# Altium PCB PCB2.PcbDoc
Units mil, origin at the board's own origin, x right, y up, seen from the top; angles counter-clockwise.
Board outline 3000 x 2250 mil, 2 copper layers (Top Layer, Bottom Layer), stack 61.756 mil thick; 45 components, 36 nets, 128 pads, 148 vias.
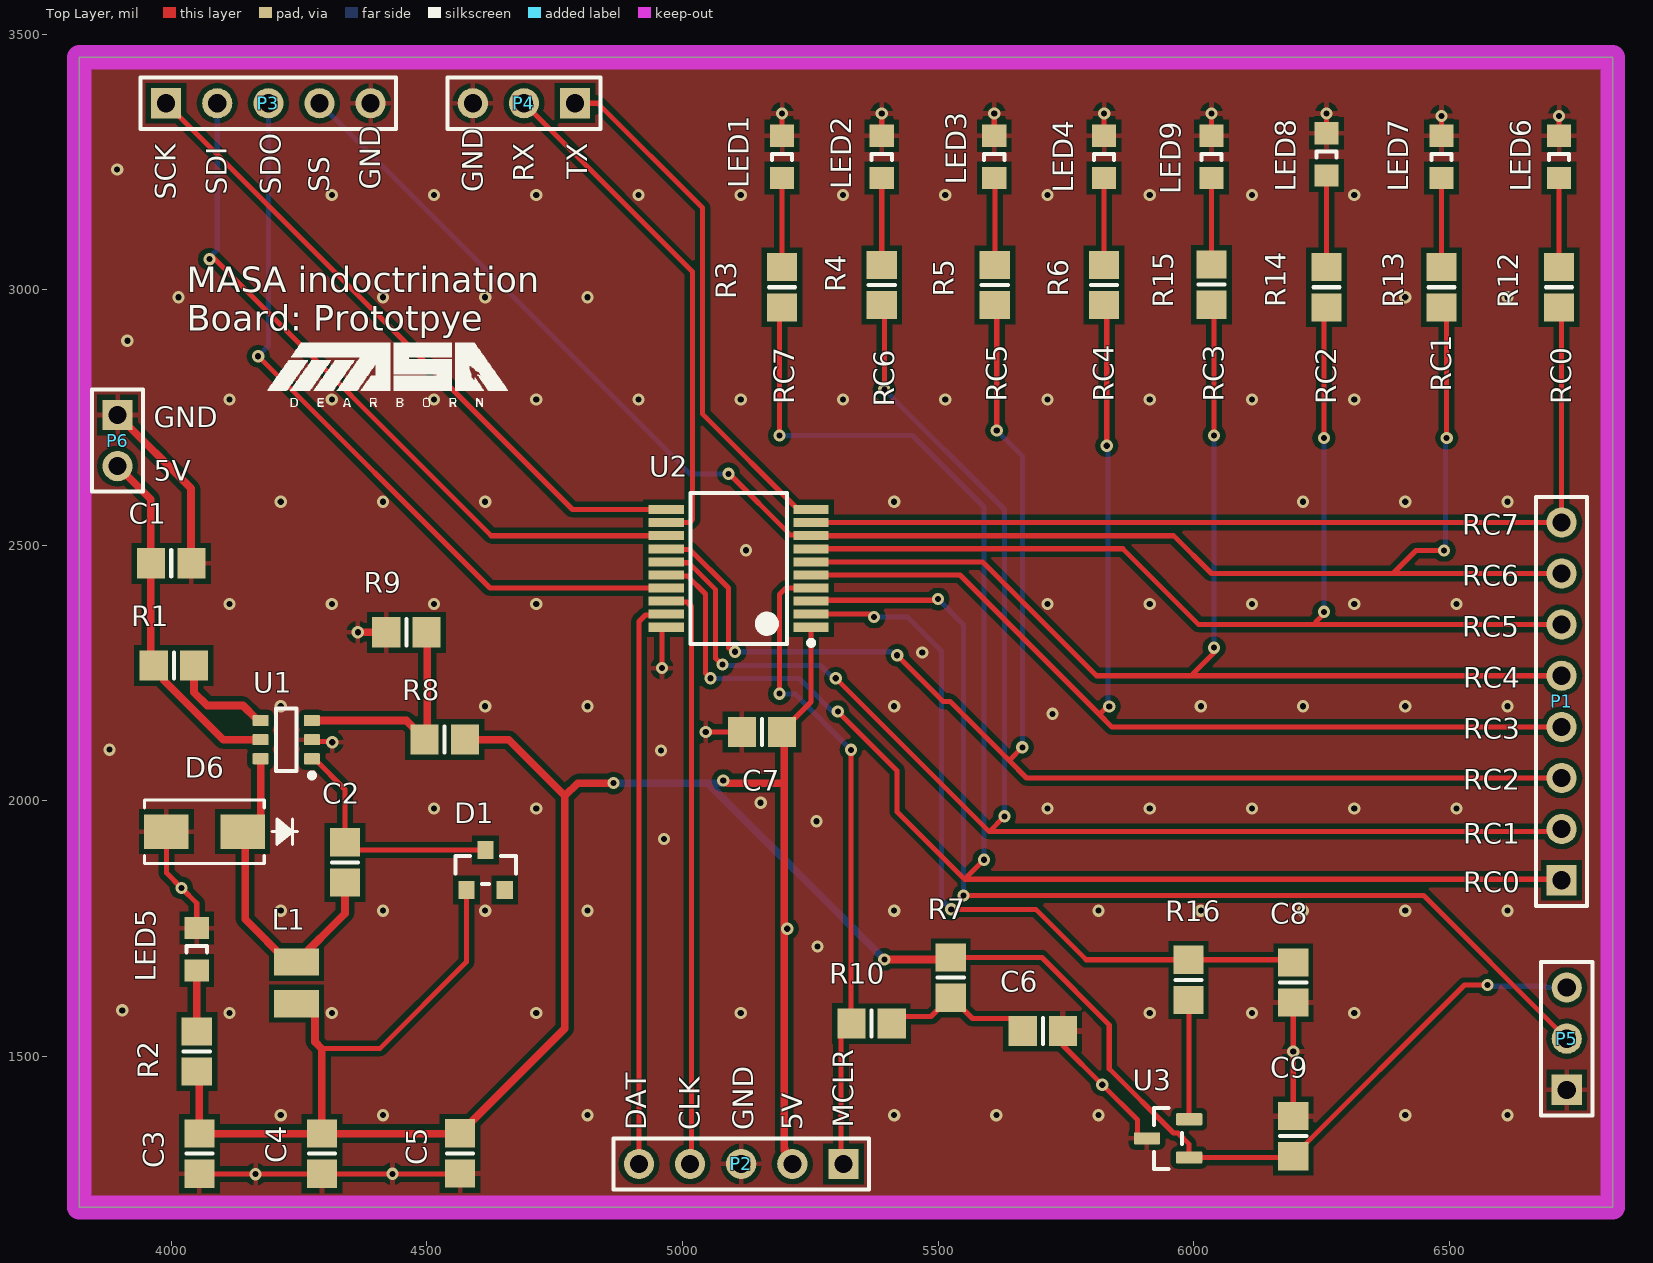
[diagram p0: Top Layer view]
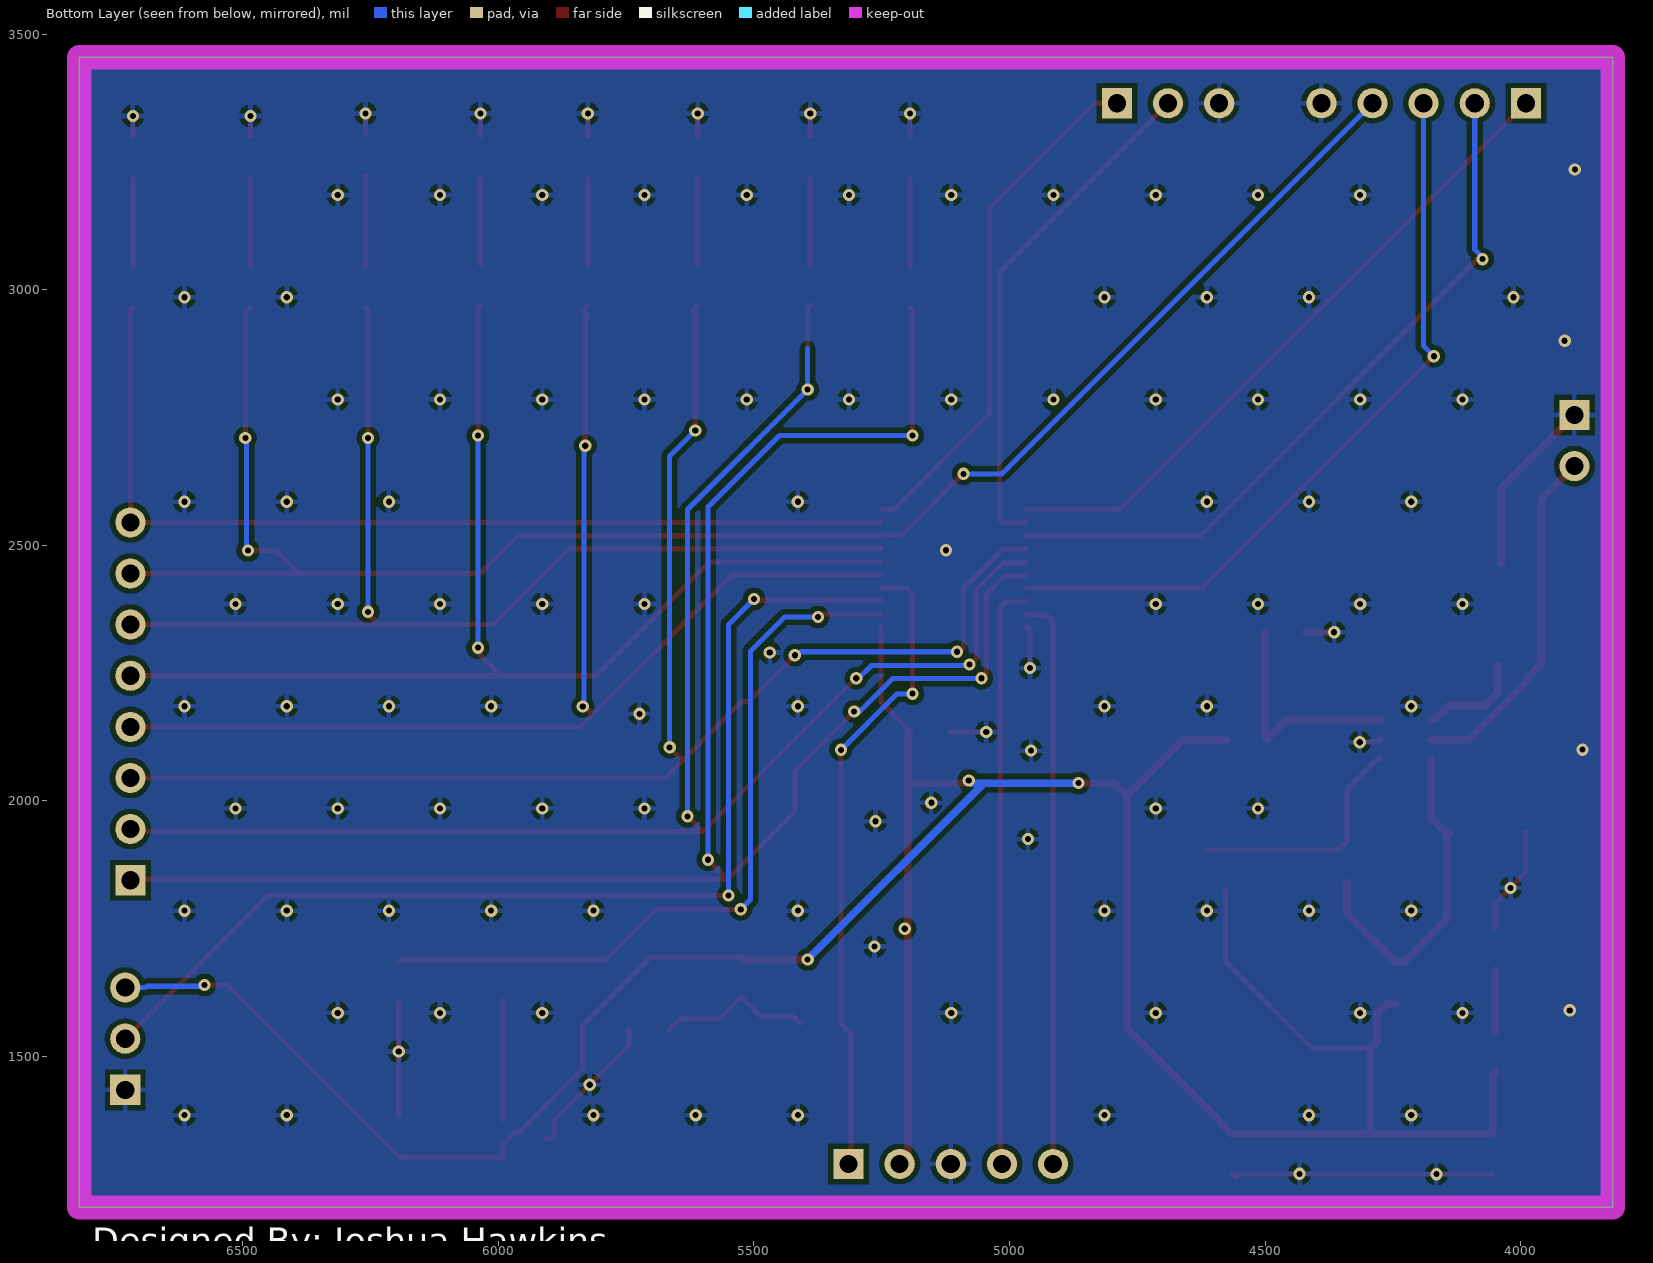
[diagram p1: Bottom Layer view, seen from below]

## Layer stack, top to bottom
Top Solder: solder mask 1, SM-001, Dk 4
Top Layer: signal copper 1.378
Dielectric 1: core 59, Core-043, Dk 4.3
Bottom Layer: signal copper 1.378
Bottom Solder: solder mask 1, SM-001, Dk 4

## Board outline
3820,1205 6820,1205 6820,3455 3820,3455

## Design rules (kind name [scope] priority, off if disabled: settings)
Clearance Clearance_1 [All] p1: gap=10 ignorepadtopadclearanceinfootprint=TRUE except(0: Arc-Hole Track-Hole SMDPad-Hole THPad-Hole Via-Hole Fill-Hole Poly-Hole Region-Hole Text-Hole)
Clearance [All] p2: gap=10 ignorepadtopadclearanceinfootprint=TRUE except(0: Arc-Hole Track-Hole SMDPad-Hole THPad-Hole Via-Hole Fill-Hole Poly-Hole Region-Hole Text-Hole)
PolygonConnect [All] p1: connectstyle=Relief reliefconductorwidth=10 reliefentries=4 polygonreliefangle="90 Angle" airgapwidth=10
RoutingVias [All] p1: holewidth=28 width=50 viastyle="Through Hole" minholewidth=28 minwidth=50 maxholewidth=28 maxwidth=50
SolderMaskExpansion [All] p1: expansion=4 istentingtop=FALSE
Width Width_1 [All] p1: maxlimit=15 minlimit=10 preferedwidth=10 minimp=50.000000 maximp=50.000000 favimp=50.000000
Width [All] p2: maxlimit=15 minlimit=10 preferedwidth=10 minimp=50.000000 maximp=50.000000 favimp=50.000000
30 further rules are at their usual default settings.

## Components (designator, comment, footprint, x,y, rotation, side; value= is the part's Value field where it differs from the comment)
C1 "Cap" 6-0805_M 4000,2465 r180 top value=10uF
C2 "Cap" 6-0805_M 4340,1880 r90 top value=10nF
C3 "Cap" 6-0805_M 4055,1310 r90 top value=10uF
C4 "Cap" 6-0805_M 4295,1310 r90 top value=1uF
C5 "Cap" 6-0805_M 4565,1310.63 r90 top value=100nF
C6 "Cap" 6-0805_M 5705,1550 r0 top value=100nF
C7 "Cap" 6-0805_M 5155.63,2135 r0 top value=100nF
C8 "Cap" 6-0805_M 6195,1645 r270 top value=680pF
C9 "Cap" 6-0805_M 6195,1344.37 r90 top value=100nF
D1 "BAT54-7-F" FP-SOT23-MFG 4615,1865 r90 top value=10pF
D6 "Diode 10TQ035" CDBA5 4065,1940 r180 top
L1 "Inductor" INDC2520X100N 4245,1644.25 r270 top value=4.7uH (schematic designator L?)
LED1 "150080BS75000" 0805_A 5195,3260 r270 top
LED2 "150080BS75000" 0805_A 5390,3260 r270 top
LED3 "150080BS75000" 0805_A 5610,3260 r270 top
LED4 "150080BS75000" 0805_A 5825,3260 r270 top
LED5 "150080BS75000" 0805_A 4050,1710 r270 top
LED6 "150080BS75000" 0805_A 6715,3260 r270 top
LED7 "150080BS75000" 0805_A 6485,3260 r270 top
LED8 "150080BS75000" 0805_A 6260,3265 r270 top
LED9 "150080BS75000" 0805_A 6035,3260 r270 top
P1 "Header 8" HDR1X8 6720,1845 r90 top
P2 "Header 5" HDR1X5 5315,1290 r180 top
P3 "Header 5" HDR1X5 3990,3365 r0 top
P4 "Header 3" HDR1X3 4790,3365 r180 top
P5 "Header 3" HDR1X3 6730,1435 r90 top
P6 "Header 2" HDR1X2 3895,2755 r270 top
R1 "Res1" 6-0805_M 4005,2265 r180 top value=10k
R2 "Res1" 6-0805_M 4050,1510 r270 top value=330
R3 "Res1" 6-0805_M 5195,3005 r270 top value=330
R4 "Res1" 6-0805_M 5390,3009.37 r270 top value=330
R5 "Res1" 6-0805_M 5611.1,3009.37 r270 top value=330
R6 "Res1" 6-0805_M 5825,3009.37 r270 top value=330
R7 "Res1" 6-0805_M 5525,1654.37 r90 top value=10k
R8 "Res1" 6-0805_M 4535,2120 r180 top value=30k
R9 "Res1" 6-0805_M 4460,2330 r0 top value=10k
R10 "Res1" 6-0805_M 5370,1565 r0 top value=330
R12 "Res1" 6-0805_M 6715,3005 r270 top value=330
R13 "Res1" 6-0805_M 6485,3005 r270 top value=330
R14 "Res1" 6-0805_M 6260,3005 r270 top value=330
R15 "Res1" 6-0805_M 6035,3010 r270 top value=330
R16 "Res1" 6-0805_M 5990,1650 r90 top value=0
U1 "LM2736XMK/NOPB" DDC0006A_L 4225,2120 r180 top
U2 "PIC16F18345-I/SS" MCHP-SS-20_V 5110,2455 r180 top
U3 "TMP235AQDBZTQ1" FP-DBZ0003A-MFG 5950,1340 r180 top

## Footprints (in the part's own frame and the unit in brackets; to place one, negate y for a bottom-side part, rotate by r counter-clockwise, add the part's x,y. Pads: shape width x height; smd on the part's side, far side on the other; paste and mask are expansions set on the pad)
6-0805_M [mm] "Chip Resistor, Body 2.0x1.2mm, IPC Low Density"
  rect 1.4x1.5 smd: 1(-1,0) 2(1,0)
  silkscreen extent 0,-0.65 0,0.65, body extent -1.07,-0.7 1.07,0.7, height 0.7
0805_A [mm] "Chip LED, 2-Leads, Body 2.0x1.3mm, IPC Medium Density"
  rect 1.1x1.2 smd: 1(-1.05,0) 2(1.05,0)
  silkscreen extent -0.15,-0.5 0.15,0.5, body extent -1,-0.62 1,0.63, height 0.68
CDBA5 [mil]
  rect 87x67 smd paste+0 mask+0: 1(-74.5,0) 2(74.5,0)
  silkscreen extent -182,-62 117,62, body extent 0,0 10,10, height 10
DDC0006A_L [mm] "SOT23, 6-Leads, Body 3.05x1.75mm, Pitch 0.95mm, IPC High Density"
  rrect18% 0.8x0.55 smd: 1(-1.275,0.95) 2(-1.275,0) 3(-1.275,-0.95) 4(1.275,-0.95) 5(1.275,0) 6(1.275,0.95)
  silkscreen extent -1.4,-1.55 0.5,1.9, body extent -1.43,-1.48 1.43,1.49, height 0.9
FP-DBZ0003A-MFG [mm]
  rrect17% 1.3x0.6 smd paste+0 mask+0: 1(-1.05,0.95) 2(-1.05,-0.95) 3(1.05,0)
  silkscreen extent -0.7,-1.52 0.7,1.52, body extent -1.8,-1.62 1.8,1.62, height 0.25
FP-SOT23-MFG [mm]
  rect 0.9x0.8 smd paste+0 mask+0: 1(-1,0.95) 2(-1,-0.95) 3(1,0)
  silkscreen extent -0.7,-1.5 0.7,1.5, body extent -1.55,-1.6 1.55,1.6, height 0.25
HDR1X2 [mm] "Connector; Header; 2 Position"
  rect 1.5x1.5 hole 0.9: 1(0,0)
  round 1.5 hole 0.9: 2(2.54,0)
  silkscreen extent -1.27,-1.27 3.81,1.27
HDR1X3 [mm] "Connector; Header; 3 Position"
  rect 1.5x1.5 hole 0.9: 1(0,0)
  round 1.5 hole 0.9: 2(2.54,0) 3(5.08,0)
  silkscreen extent -1.27,-1.27 6.35,1.27
HDR1X5 [mm] "Connector; Header; 5 Position"
  rect 1.5x1.5 hole 0.9: 1(0,0)
  round 1.5 hole 0.9: 2(2.54,0) 3(5.08,0) 4(7.62,0) 5(10.16,0)
  silkscreen extent -1.27,-1.27 11.43,1.27
HDR1X8 [mm] "Connector; Header; 8 Position"
  rect 1.5x1.5 hole 0.9: 1(0,0)
  round 1.5 hole 0.9: 2(2.54,0) 3(5.08,0) 4(7.62,0) 5(10.16,0) 6(12.7,0) 7(15.24,0) 8(17.78,0)
  silkscreen extent -1.27,-1.27 19.05,1.27
INDC2520X100N [mm]
  rect 1.35x2.22 smd: 1(-1.035,0) 2(1.035,0)
MCHP-SS-20_V [mm] "SOP, 20-Leads, Body 7.50x5.60mm, Pitch 0.65mm"
  rect 1.75x0.45 smd: 1(-3.6,2.925) 2(-3.6,2.275) 3(-3.6,1.625) 4(-3.6,0.975) 5(-3.6,0.325) 6(-3.6,-0.325) 7(-3.6,-0.975) 8(-3.6,-1.625) 9(-3.6,-2.275) 10(-3.6,-2.925) 11(3.6,-2.925) 12(3.6,-2.275) 13(3.6,-1.625) 14(3.6,-0.975) 15(3.6,-0.325) 16(3.6,0.325) 17(3.6,0.975) 18(3.6,1.625) 19(3.6,2.275) 20(3.6,2.925)
  silkscreen extent -3.73,-3.75 2.4,3.82, body extent -3.9,-3.75 3.9,3.75, height 2

## Part data
C1 C2 C3 C4 C5 C6 C7 C8 C9: "Capacitor", LatestRevisionDate=17-Jul-2002, LatestRevisionNote="Re-released for DXP Platform.", PackageDescription="Radial Cap, Thru-Hole; 2 Leads; 0.3 in Pin Spacing", PackageReference=RAD-0.3, Published=8-Jun-2000, Publisher="Altium Limited"
D1: library part CMP-0303-00002-2, "DIODE SCHOTTKY 30V 200MA SOT23-3", Capacitance=10pF, Forward Current=200mA, Manufacturer="Diodes Inc.", Max Junction Temp=+150°C, Max Repetitive Reverse Voltage=30V, Max Surge Forward Current=600mA, Package=SOT23, Peak Reverse Current=2uA, Temperature="-65°C to +150°C", Temperature Range Low=-65°C, Automotive=No, Automotive Grade=NA, Category=Diode, ComponentLink2Description=Datasheet, ComponentLink2URL=https://www.diodes.com/assets/Datasheets/ds11005.pdf, Device Class L1="Discrete Semiconductors", Device Class L2=Diodes, Device Class L3="Schottky Diodes", Digikey Description="DIODE SCHOTTKY 30V 200MA SOT23-3", Footprint Url=https://www.diodes.com/assets/Package-Files/SOT23.pdf, Height=1.1mm, Lead Free=Yes, Manufacturer Part Number=BAT54-7-F, Mouser Description="Switching diode SOT-23 30 V 200 mA", Octopart=https://octopart.com/bat54-7-f-diodes+inc.-39681803, Reverse Voltage=30V, RoHS=TRUE, Standoff Height=0.013mm, Temperature Range High=+150°C
D6: "Schottky Rectifier", ComponentLink1Description="Manufacturer Link", ComponentLink1URL=http://www.irf.com/, ComponentLink2Description=Datasheet, ComponentLink2URL=http://www.irf.com/product-info/datasheets/data/10tq.pdf, DatasheetVersion=PD-2.057B, LatestRevisionDate=17-Jul-2002, LatestRevisionNote="Re-released for DXP Platform.", Note="Terminal 2 is the TAB and is electrically connected to the cathode", PackageDescription="TO, Thru-Hole, Vertical, Heatsink Mounted; 3 In-Line Leads (1 Absent); Pitch 2.54 mm", PackageReference=TO-220AC, PackageVersion=Feb-1998, Published=8-Jun-2000, Publisher="Altium Limited"
LED1 LED2 LED3 LED4 LED5 LED6 LED7 LED8 LED9: library part CMP-1426-00008-1, "SMD mono-color Chip LED, WL-SMCW, Blue", Color=Blue, Manufacturer="Wuerth Elektronik", ComponentLink1Description="Manufacturer URL", ComponentLink1URL=http://www.we-online.com, ComponentLink2Description=Datasheet, ComponentLink2URL=http://katalog.we-online.com/led/datasheet/150080BS75000.pdf, PackageReference=0805_A, PartNumber=150080BS75000
P1: "Header, 8-Pin", LatestRevisionDate=17-Jul-2002, LatestRevisionNote="Re-released for DXP Platform.", Publisher="Altium Limited"
P2 P3: "Header, 5-Pin", LatestRevisionDate=17-Jul-2002, LatestRevisionNote="Re-released for DXP Platform.", Publisher="Altium Limited"
P4 P5: "Header, 3-Pin", LatestRevisionDate=17-Jul-2002, LatestRevisionNote="Re-released for DXP Platform.", Publisher="Altium Limited"
P6: "Header, 2-Pin", LatestRevisionDate=17-Jul-2002, LatestRevisionNote="Re-released for DXP Platform.", Publisher="Altium Limited"
R1 R2 R3 R4 R5 R6 R7 R8 R9 R10 R12 R13 R14 R15 R16: "Resistor", LatestRevisionDate=17-Jul-2002, LatestRevisionNote="Re-released for DXP Platform.", PackageDescription="Axial Device, Thru-Hole; 2 Leads; 0.3 in Pin Spacing", PackageReference=AXIAL-0.3, Published=8-Jun-2000, Publisher="Altium Limited"
U1: library part CMP-0069-01211-3, "750mA Load Step-Down DC-DC Regulator, 6-pin Tiny SOT23, Pb-Free", Manufacturer="Texas Instruments", PackageTopMarking=SHAB*XTT, PowerWise=N, Code_IPC=SOT26A-6, Code_JEDEC=MO-193-AA, ComponentLink1Description="Datasheet URL", ComponentLink1URL=http://www.ti.com/general/docs/lit/getliterature.tsp?genericPartNumber=LM2736&fileType=pdf, CompType=Switcher, PackageDescription="Molded TSOT, 2.97 x 1.65 x 0.87mm Body, 6 Lead, 0.95mm Pitch", PackageReference=DDC0006A, PinCount=6, RoHS=Y
U2: library part CMP-2000-06894-1, "Full-Featured, Low Pin Count Microcontrollers with XLP, 8 Bit, 14 KB, 1024 RAM, 1.8 to 5.5 V, -40 to 85 degC, 20-Pin SSOP (SS), RoHS, Tube", Manufacturer=Microchip-Technology, Operating Temperature=-40°C~85°C(TA), Package / Case="20-SSOP(0.209\",5.30mmWidth)", Package Description="20-Pin Shrink Small Outline Package Integrated Circuit, Body 7.2 x 5.3 mm, Pitch 0.65 mm", Package Reference=SS-20, Supplier Device Package=20-SSOP, Voltage - Supply (Vcc/Vdd)=2.3V~5.5V, Category=IntegratedCircuits(ICs), Connectivity=I²C,LIN,SPI,UART/USART, Core Processor=PIC, Core Size=8-Bit, Data Converters=A/D17x10b,D/A1x5b, Datasheet URL=http://ww1.microchip.com/downloads/en/DeviceDoc/40001795C.pdf, Datasheet Version="Rev. C, 10/2016", EEPROM Size=256x8, Family=Embedded-Microcontrollers, Manufacturer URL=http://www.microchip.com/, Mounting Technology=SurfaceMount, Number of I/O=18, Oscillator Type=Internal, Package URL=http://ww1.microchip.com/downloads/en/PackagingSpec/00000049CE.pdf, Packaging=Tube, Peripherals=Brown-outDetect/Reset,POR,PWM,WDT, Program Memory Size=14KB(8Kx14), Program Memory Type=FLASH, RAM Size=1Kx8, Series=PIC®XLP™16F, Speed=32MHz
U3: library part CMP-04948-000003-1, "LOW-POWER HIGH-ACCURACY ANALOG O", Ambient Temperature Range High=+150°C, Ambient Temperature Range Low=-40°C, Manufacturer="Texas Instruments", Manufacturer Part Number=TMP235A2DBZR, Max Supply Voltage=5.5V, Min Supply Voltage=2.3V, Operating Supply Current=9uA, Output Current=500uA, Package=DBZ0003A, Temperature="-40°C to +150°C", Accuracy=0.5%, Automotive=No, Category=IC, ComponentLink2Description=Datasheet, ComponentLink2URL=http://www.ti.com/lit/ds/symlink/tmp235.pdf, Device Class L1=Sensors, Device Class L2="Temperature and Humidity Sensors", Device Class L3=unset, Digikey Description="LOW-POWER HIGH-ACCURACY ANALOG O", Height=1.12mm, Lead Free=Yes, Max Junction Temp=+150°C, Mouser Description="±2°C Analog output temperature sensor, with 10mV /°C gain 3-SOT-23 -40 to 150", Octopart=https://octopart.com/tmp235a2dbzr-texas+instruments-94966376, RoHS=TRUE, Sensor Output="Analog Voltage", Standoff Height=0.01mm, Temperature Range High=+150°C, Temperature Range Low=-40°C
L1: Code_IEC=1005, Code_JEITA=0402, LatestRevisionDate=29-May-2009, LatestRevisionNote="IPC-7351 Footprint Added.", PackageDescription="Chip Inductor", PackageReference=0402-A, Published=8-Jun-2000, Publisher="Altium Limited"

## Via types
v1: diameter 24, hole 12, Top Layer to Bottom Layer, 148 vias

## Nets (pads, with @x,y where several pads share a name; then routed paths per layer and width w, separated by ;. In a path a pad name is that pad's centre, name@x,y a point inside that pad or via, vN(x,y) a via of type N, cw(c..) or ccw(c..) an arc to the next point about the centre after c; other vN are vias at no path point)
5V0: C3.2 C4.2 C5.2 C7.2 C9.1 D1.1 L1.2 P2.2 P5.3 R2.2 R7.2 R8.1 U2.1 U3.1 | length 6112.5
  Top Layer w10: C4.2@4294.33,1350.04 C4.2 ; 4294.33,1515.52 4407.8,1515.52 4577.6,1685.31 D1.1 ; C7.2 5195,2136.97 5251.73,2193.7 U2.1 ; P2.2 P2.2@5215,1303.27 ; R7.2 5703.3,1693.74 5835,1562.04 5835,1476.3 5960.71,1350.59 5969.41,1350.59 5991.34,1328.66 U3.1 6192.6,1302.6 C9.1 6530,1640 v1(6575,1640)
  Top Layer w15: R2.2 4055,1465.63 C3.2 C4.2 4566.34,1349.37 4587.03,1370.06 4587.03,1372.03 4770,1555 4770,2010 ; L1.2 4262.13,1603.5 4281.2,1584.43 4281.2,1528.65 4294.33,1515.52 C4.2@4294.33,1350.04 ; R8.1 4574.61,2119.76 4660.24,2119.76 4770,2010 ; v1(4865,2035) 4795,2035 4770,2010 ; v1(5080,2040) 5082.44,2040 5087.44,2035 5199.24,2035 ; C7.2 5199.24,2130.76 5199.24,2035 ; P2.2@5215,1303.27 5213.65,1303.27 5199.85,1317.07 5199.85,1320.2 5199.24,1320.81 5199.24,2035 ; v1(5395,1690) 5521.26,1690 R7.2
  Bottom Layer w10: v1(6575,1640) 6577.5,1637.5 6687.5,1637.5 6690,1635 P5.3
  Bottom Layer w15: v1(4865,2035) 5050,2035 ; v1@5075,2035 5050,2035 ; v1(5395,1690) 5050,2035
  other v1: 5205,1750
7V4: C1.2 P6.2 R1.2 U1.5 | length 694.9
  Top Layer w15: P6.2 3960,2590 3960,2465.63 C1.2 3960,2464.37 3960,2270.63 R1.2 ; R1.2@3963.66,2265 3985.69,2242.97 3985.69,2236.3 4101.99,2120 U1.5
CLK/PDC: P2.4 U2.18 | length 1145.4
  Top Layer w10: U2.18 4970,2389.29 5008.93,2389.29 5017.72,2380.5 5017.72,1292.72 P2.4
DAT/PGD: P2.5 U2.19 | length 1120.3
  Top Layer w10: P2.5 4915,2351.1 4927.61,2363.7 4966.54,2363.7 U2.19
GND: C1.1 C3.1 C4.1 C5.1 C6.2 C7.1 C8.2 C9.2 D6.2 LED1.1 LED2.1 LED3.1 LED4.1 LED5.1 LED6.1 LED7.1 LED8.1 LED9.1 P2.3 P3.5 P4.3 P5.1 P6.1 R9.1 U1.2 U2.20 U3.3 | length 2172.9
  Top Layer w10: D6.2 3990.5,1859.5 v1(4020,1830) 4050,1800 LED5.1 ; C1.1@4038.74,2465.63 C1.1 ; C3.1 4055.63,1270 v1(4165,1270) 4294.37,1270 C4.1 v1(4432.84,1270.63) 4553.11,1270.63 4558.74,1265 C5.1 ; U1.2@4278.47,2116.72 v1@4313.28,2116.72 ; v1(4960,2260) 4960,2335.98 4963.86,2339.84 U2.20 ; v1@5050.63,2135 C7.1 ; P2.3@5112.5,1292.5 P2.3 ; LED1.1 v1(5195,3345) ; LED2.1 v1(5390,3345) ; LED3.1 5610,3335 5610.86,3335.86 5610.86,3344.14 v1(5610,3345) ; C6.2@5744.37,1548.03 5744.37,1521.93 v1(5821.38,1444.92) 5890.08,1376.22 5890.08,1346.81 5896.89,1340 U3.3 ; LED4.1 v1(5825,3345) ; LED9.1 v1(6035,3345) ; C9.2 C8.2 ; LED8.1 v1(6260,3345) ; LED7.1 v1(6485,3340) ; LED6.1 v1(6715,3340)
  Top Layer w15: P6.1 4038.74,2611.26 C1.1@4038.74,2465.63 ; U1.2 U1.2@4278.47,2116.72 ; v1@4313.28,2116.72 v1(4315,2115) ; v1(4365,2330) R9.1 ; C6.2@5744.37,1548.03 C6.2
  other v1: 4214.15,1385.43 4414.15,1385.43 4814.15,1385.43 5414.15,1385.43 5614.15,1385.43 5814.15,1385.43 6414.15,1385.43 6614.15,1385.43 6195,1510 4114.15,1585.43 4314.15,1585.43 4714.15,1585.43 5114.15,1585.43 5914.15,1585.43 6114.15,1585.43 6314.15,1585.43 3904.15,1590.43 5264.15,1715.43 4214.15,1785.43 4414.15,1785.43 4614.15,1785.43 4814.15,1785.43 5414.15,1785.43 5814.15,1785.43 6014.15,1785.43 6214.15,1785.43 6414.15,1785.43 6614.15,1785.43 4964.15,1925.43 5262.33,1960.43 4514.15,1985.43 4714.15,1985.43 5714.15,1985.43 5914.15,1985.43 6114.15,1985.43 6314.15,1985.43 6514.15,1985.43 5153.01,1996.57 4957.97,2098.67 3879.15,2100.43 5045.63,2135 5724.15,2170.43 4214.15,2185.43 4614.15,2185.43 4814.15,2185.43 5414.15,2185.43 6014.15,2185.43 6214.15,2185.43 6414.15,2185.43 6614.15,2185.43 5469.15,2290.43 4114.15,2385.43 4314.15,2385.43 4514.15,2385.43 4714.15,2385.43 5714.15,2385.43 5914.15,2385.43 6114.15,2385.43 6314.15,2385.43 6514.15,2385.43 5124.15,2490.43 4214.15,2585.43 4414.15,2585.43 4614.15,2585.43 5414.15,2585.43 6214.15,2585.43 6414.15,2585.43 6614.15,2585.43 4114.15,2785.43 4314.15,2785.43 4514.15,2785.43 4714.15,2785.43 4914.15,2785.43 5114.15,2785.43 5314.15,2785.43 5514.15,2785.43 5714.15,2785.43 5914.15,2785.43 6114.15,2785.43 6314.15,2785.43 3914.15,2900.43 4014.15,2985.43 4414.15,2985.43 4614.15,2985.43 4814.15,2985.43 6414.15,2985.43 6614.15,2985.43 4314.15,3185.43 4514.15,3185.43 4714.15,3185.43 4914.15,3185.43 5114.15,3185.43 5314.15,3185.43 5514.15,3185.43 5714.15,3185.43 5914.15,3185.43 6114.15,3185.43 6314.15,3185.43 3894.15,3235.43
MCLR: P2.1 R10.1 U2.4 | length 1240.5
  Top Layer w10: v1(5190,2210) 5190,2404.33 5202.28,2416.61 U2.4 ; P2.1@5310,1315 5310,1544.37 R10.1 5330,1565.63 v1(5330,2100)
  Bottom Layer w10: v1(5190,2210) 5190.79,2209.21 5220.79,2209.21 v1(5330,2100)
NetC2_1: C2.1 D6.1 L1.1 U1.6 | length 659.3
  Top Layer w15: D6.1 4148.8,1940 4174.8,1966 U1.6 ; D6.1@4144.5,1935 4144.5,1768.37 4227.87,1685 L1.1 4340,1780 C2.1
NetC2_2: C2.2 D1.3 U1.1 | length 475
  Top Layer w10: U1.1 4280.12,2082.6 4340,2022.72 C2.2@4340,1921.34 ; C2.2 C2.2@4340,1921.34 ; D1.3 4356.97,1904.37 C2.2@4340,1921.34
NetC6_1: C6.1 R7.1 R10.2 | length 303.1
  Top Layer w10: R10.2 5422.67,1578.3 5486.33,1578.3 5523.03,1615 R7.1 ; R7.1@5526.97,1615 5567.44,1574.53 5643.07,1574.53 5665.63,1551.97 C6.1
NetLED1_2: LED1.2 R3.1 | length 174.3
  Top Layer w10: R3.1 LED1.2
NetLED2_2: LED2.2 R4.1 | length 169.9
  Top Layer w10: R4.1 LED2.2
NetLED3_2: LED3.2 R5.1 | length 170.4
  Top Layer w10: LED3.2 5611.1,3217.56 R5.1
NetLED4_2: LED4.2 R6.1 | length 169.9
  Top Layer w10: R6.1 LED4.2
NetLED5_2: LED5.2 R2.1 | length 119.3
  Top Layer w15: R2.1 LED5.2
NetLED6_2: LED6.2 R12.1 | length 174.3
  Top Layer w10: R12.1 LED6.2
NetLED7_2: LED7.2 R13.1 | length 174.3
  Top Layer w10: R13.1 LED7.2
NetLED8_2: LED8.2 R14.1 | length 179.3
  Top Layer w10: R14.1 LED8.2
NetLED9_2: LED9.2 R15.1 | length 169.3
  Top Layer w10: R15.1 LED9.2
NetP5_2: P5.2 U2.3 | length 2121.9
  Top Layer w10: U2.3 5253.46,2392.76 5497.76,2392.76 v1(5500,2395) ; v1(5550,1815) 6450,1815 P5.2@6712.5,1552.5
  Bottom Layer w10: v1(5500,2395) 5550,2345 v1(5550,1815)
NetR1_1: R1.1 U1.4 | length 205.5
  Top Layer w15: R1.1 4044.37,2212.97 4070.49,2186.85 4140.43,2186.85 4166.56,2160.73 4171.48,2160.73 U1.4
NetR8_2: R8.2 R9.2 U1.3 | length 449.7
  Top Layer w15: U1.3 4460.2,2157.4 4495.63,2121.97 R8.2 4500.63,2125 4500.63,2328.74 R9.2
NetR16_1: R16.1 U3.2 | length 233.8
  Top Layer w10: R16.1 5991.34,1609.29 U3.2
RC0: P1.1 R3.2 U2.16 | length 3577.1
  Top Layer w10: U2.16 4970,2440.47 5009.53,2440.47 5045,2405 5045,2250 ; v1(5190,2715) 5190,2960.63 R3.2 ; v1(5304.09,2175) 5420,2059.09 5420,1979 5552,1847 ; v1(5590,1885) 5552,1847 ; P1.1 6718,1847 5552,1847
  Bottom Layer w10: v1(5055,2240) 5228.18,2240 5293.18,2175 v1(5304.09,2175) ; v1(5190,2715) 5450,2715 5590,2575 v1(5590,1885)
RC1: P1.2 R4.2 U2.15 | length 3273.2
  Top Layer w10: U2.15 4970,2466.06 5012.22,2466.06 5065,2413.28 5065,2278.54 5076.54,2267 v1(5078.54,2267) ; v1(5300,2240) 5600,1940 ; R4.2 5395,2965 v1(5395,2805) ; v1(5630,1970) 5600,1940 ; P1.2 6715,1940 5600,1940
  Bottom Layer w10: v1(5078.54,2267) 5080.54,2265 5270,2265 5295,2240 v1(5300,2240) ; 5395,2885 v1(5395,2805) 5630,2570 v1(5630,1970)
RC2: P1.3 R5.2 U2.14 | length 2933.9
  Top Layer w10: U2.14 4970,2491.65 5014.91,2491.65 5090,2416.57 5090,2299.39 5091.82,2299.39 5099.21,2292 v1(5103,2292) ; v1(5420,2285) 5510,2195 5523.28,2195 5639.14,2079.14 ; R5.2 5620,2961.1 5615,2956.1 v1(5615,2725) ; v1(5665,2105) 5639.14,2079.14 ; P1.3 5673.28,2045 5639.14,2079.14
  Bottom Layer w10: v1(5103,2292) 5409.21,2292 5416.21,2285 v1(5420,2285) ; v1(5615,2725) 5665,2675 5665,2105.91 v1@5664.55,2105.45
RC3: P1.4 R6.2 U2.5 | length 2415
  Top Layer w10: U2.5 5542.8,2442.2 5815,2170 ; R6.2 5835,2960 5825,2950 5830,2945 v1(5830,2695) ; v1(5835,2185) 5831.21,2185 5816.21,2170 5815,2170 ; P1.4 5840,2145 5815,2170
  Bottom Layer w10: v1(5830,2695) 5832.5,2692.5 5832.5,2187.5 v1(5835,2185)
RC4: P1.5 R15.2 U2.6 | length 2304.8
  Top Layer w10: U2.6 5587.2,2467.8 5810,2245 6000,2245 ; R15.2 6040,2965.63 v1(6040,2715) ; v1(6040,2300) 6040,2290 6000,2250 6000,2245 ; P1.5 6000,2245
  Bottom Layer w10: v1(6040,2300) v1(6040,2715)
RC5: P1.6 R14.2 U2.7 | length 2158.6
  Top Layer w10: U2.7 5861.61,2493.39 6010,2345 6240,2345 ; v1(6255,2370) 6255,2366.21 6240,2351.21 6240,2345 ; v1(6255,2710) 6255,2960.63 R14.2 ; P1.6 6240,2345
  Bottom Layer w10: v1(6255,2370) v1(6255,2710)
RC6/SS: P1.7 P3.4 R13.2 U2.8 | length 3414.3
  Top Layer w10: v1@5090,2641.78 5211.07,2520.71 5252.05,2520.71 5252.76,2520 U2.8 5961.02,2518.98 6035,2445 6390,2445 ; R13.2 6495,2955.63 v1(6495,2710) ; v1(6490,2490) 6435,2490 6390,2445 ; P1.7 6390,2445
  Bottom Layer w10: P3.4 5015,2640 v1(5090,2640) ; v1(6490,2490) 6492.5,2492.5 6492.5,2707.5 v1(6495,2710)
RC7: P1.8 R12.2 U2.9 | length 1891.1
  Top Layer w10: U2.9 6719.57,2544.57 P1.8 6720,2960.63 R12.2
RX: P4.2 U2.12 | length 1004.8
  Top Layer w10: P4.2 5019.57,3035.43 5019.57,2550.42 5013.71,2544.57 U2.12
SCK: P3.1 U2.11 | length 1307.5
  Top Layer w10: P3.1 4784.84,2570.16 U2.11
SDI: P3.2 U2.13 | length 1425.7
  Top Layer w10: v1@4080,3065 4626.02,2518.98 U2.13
  Bottom Layer w10: v1(4075,3060) 4075,3063.79 4090,3078.79 P3.2
SDO: P3.3 U2.17 | length 1489.4
  Top Layer w10: v1(4170,2870) 4623.39,2416.61 U2.17
  Bottom Layer w10: v1(4170,2870) 4190,2890 P3.3
Temp: C8.1 R16.2 U2.2 | length 1510.1
  Top Layer w10: U2.2 5365.78,2365.43 5371.21,2360 v1(5375,2360) ; v1(5526,1788) 5691.32,1788 5789.95,1689.37 6190,1689.37 C8.1
  Bottom Layer w10: v1(5375,2360) 5440,2360 5507,2293 5507,1807.18 5526,1788.18 v1(5526,1788)
TX: P4.1 U2.10 | length 1027.2
  Top Layer w10: P4.1 4834.53,3365 5039.57,3159.96 5039.57,2756.73 5226.14,2570.16 U2.10
pads on no net: D1.2

## Polygon pours and split planes (outlines as drawn)
GND on Bottom Layer "GND_L02_P000" (solid, pour order 0): 3820,3455 6820,3455 6820,1205 3820,1205
no net on Bottom Layer "NONET_L02_P002" (solid, pour order 2): 6485,1285
no net on Bottom Layer "NONET_L02_P001" (solid, pour order 1): 3115,1385
GND on Top Layer "GND_L01_P003" (solid, pour order 3): 3820,3455 6820,3455 6820,1205 6795,1205 3820,1205

## Keep-outs
Keep-Out Layer:
  the board outline again, w47.24

## Silkscreen, mask and mechanical layers (free items; w line width, h text height)
Top Overlay:
  drawing of 14 lines, arcs and shapes, not listed
  text "TX" at 4814,3216 h40 r90
  text "RX" at 4709,3211 h40 r90
  text "GND" at 4409,3196 h40 r90
  text "SS" at 4309,3191 h40 r90
  text "GND" at 4609,3191 h40 r90
  text "SDI" at 4109,3186 h40 r90
  text "SDO" at 4214,3186 h40 r90
  text "SCK" at 4009,3176 h40 r90
  text "MASA indoctrination / Board: Prototpye" at 4030,2920 h50
  text "RC1" at 6504,2801 h40 r90
  text "RC5" at 5634,2781 h40 r90
  text "RC4" at 5844,2781 h40 r90
  text "RC3" at 6059,2781 h40 r90
  text "RC7" at 5219,2776 h40 r90
  text "RC2" at 6279,2776 h40 r90
  text "RC0" at 6739,2776 h40 r90
  text "RC6" at 5414,2771 h40 r90
  text "GND" at 3966,2731 h40
  text "5V" at 3966,2626 h40
  text "RC7" at 6526,2521 h40
  text "RC6" at 6526,2421 h40
  text "RC5" at 6526,2321 h40
  text "RC4" at 6527.97,2221.85 h40
  text "RC3" at 6527.97,2121.85 h40
  text "RC2" at 6527.97,2021.85 h40
  text "RC1" at 6527.97,1916.85 h40
  text "RC0" at 6527.97,1821.85 h40
  text "MCLR" at 5334,1361 h40 r90
  text "DAT" at 4929,1356 h40 r90
  text "CLK" at 5034,1356 h40 r90
  text "GND" at 5139,1356 h40 r90
  text "5V" at 5234,1356 h40 r90
Bottom Overlay:
  text "Designed By: Joshua Hawkins" at 6795,1115 h50